# Altium PCB WL-EEG.PcbDoc
Units mil, origin at the board's own origin, x right, y up, seen from the top; angles counter-clockwise.
Board outline 6000 x 4000 mil, 2 copper layers (Top Layer, Bottom Layer); 1 components, 0 nets, 36 pads, 0 vias.
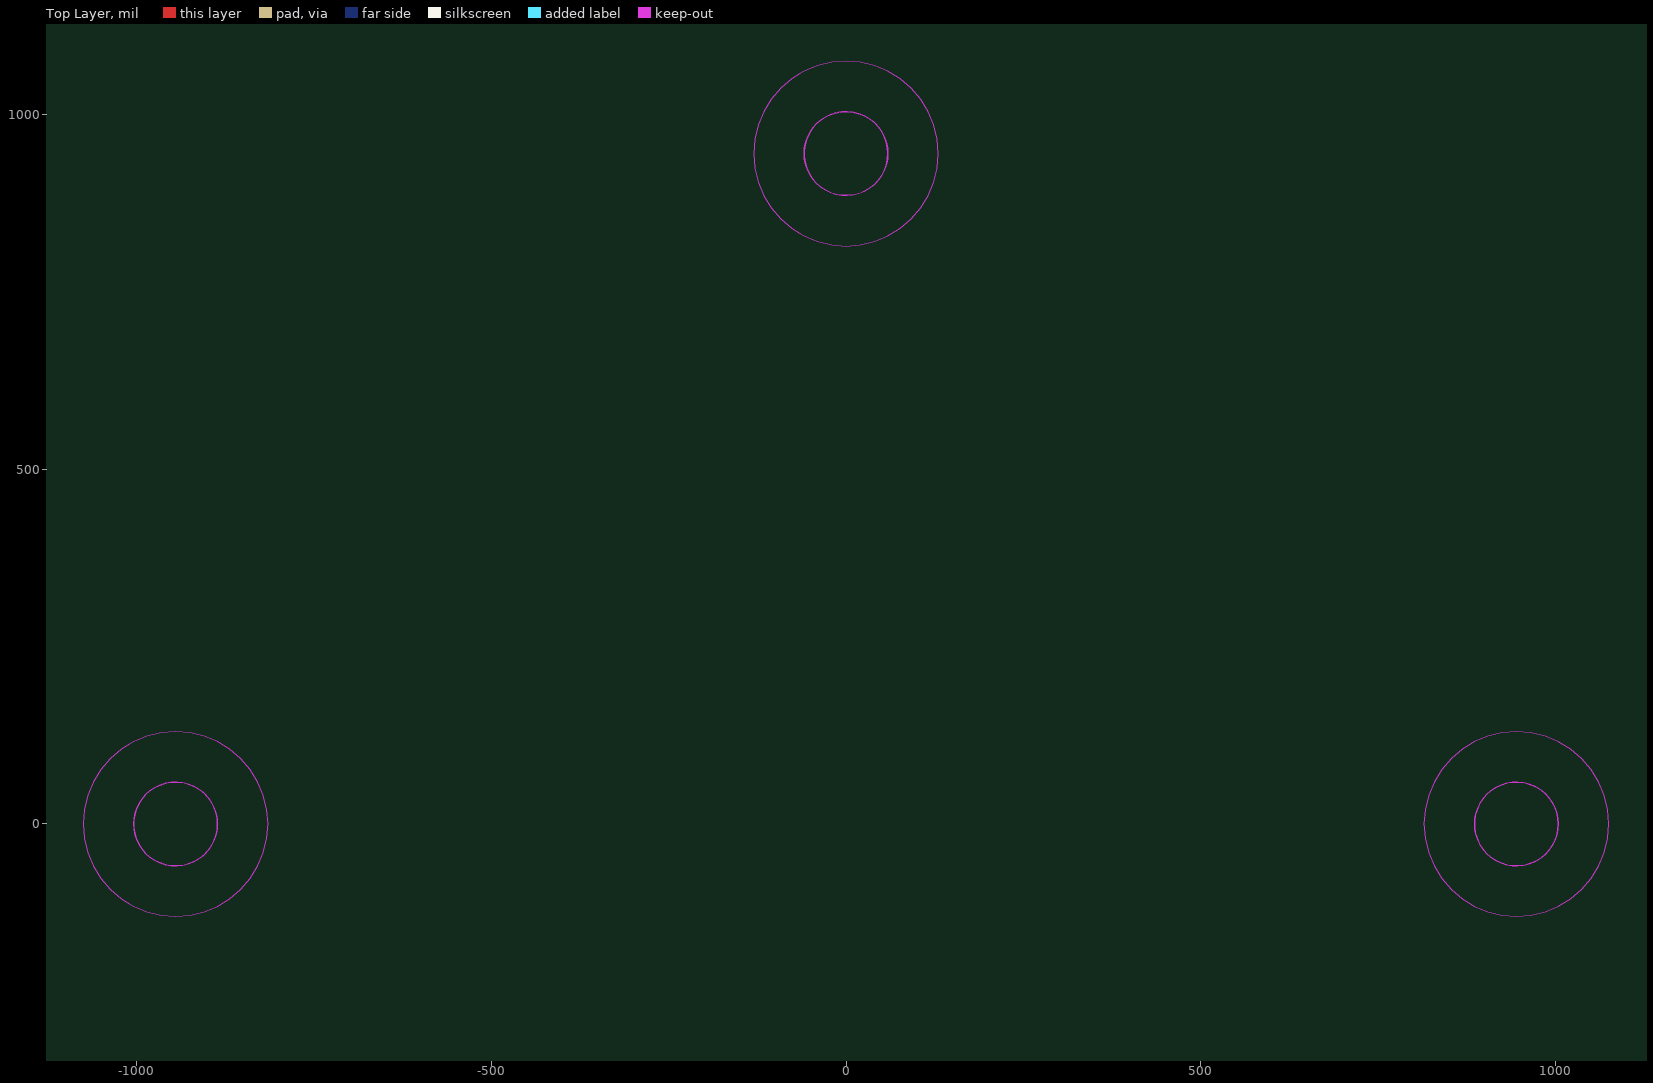
[diagram p0: Top Layer view]
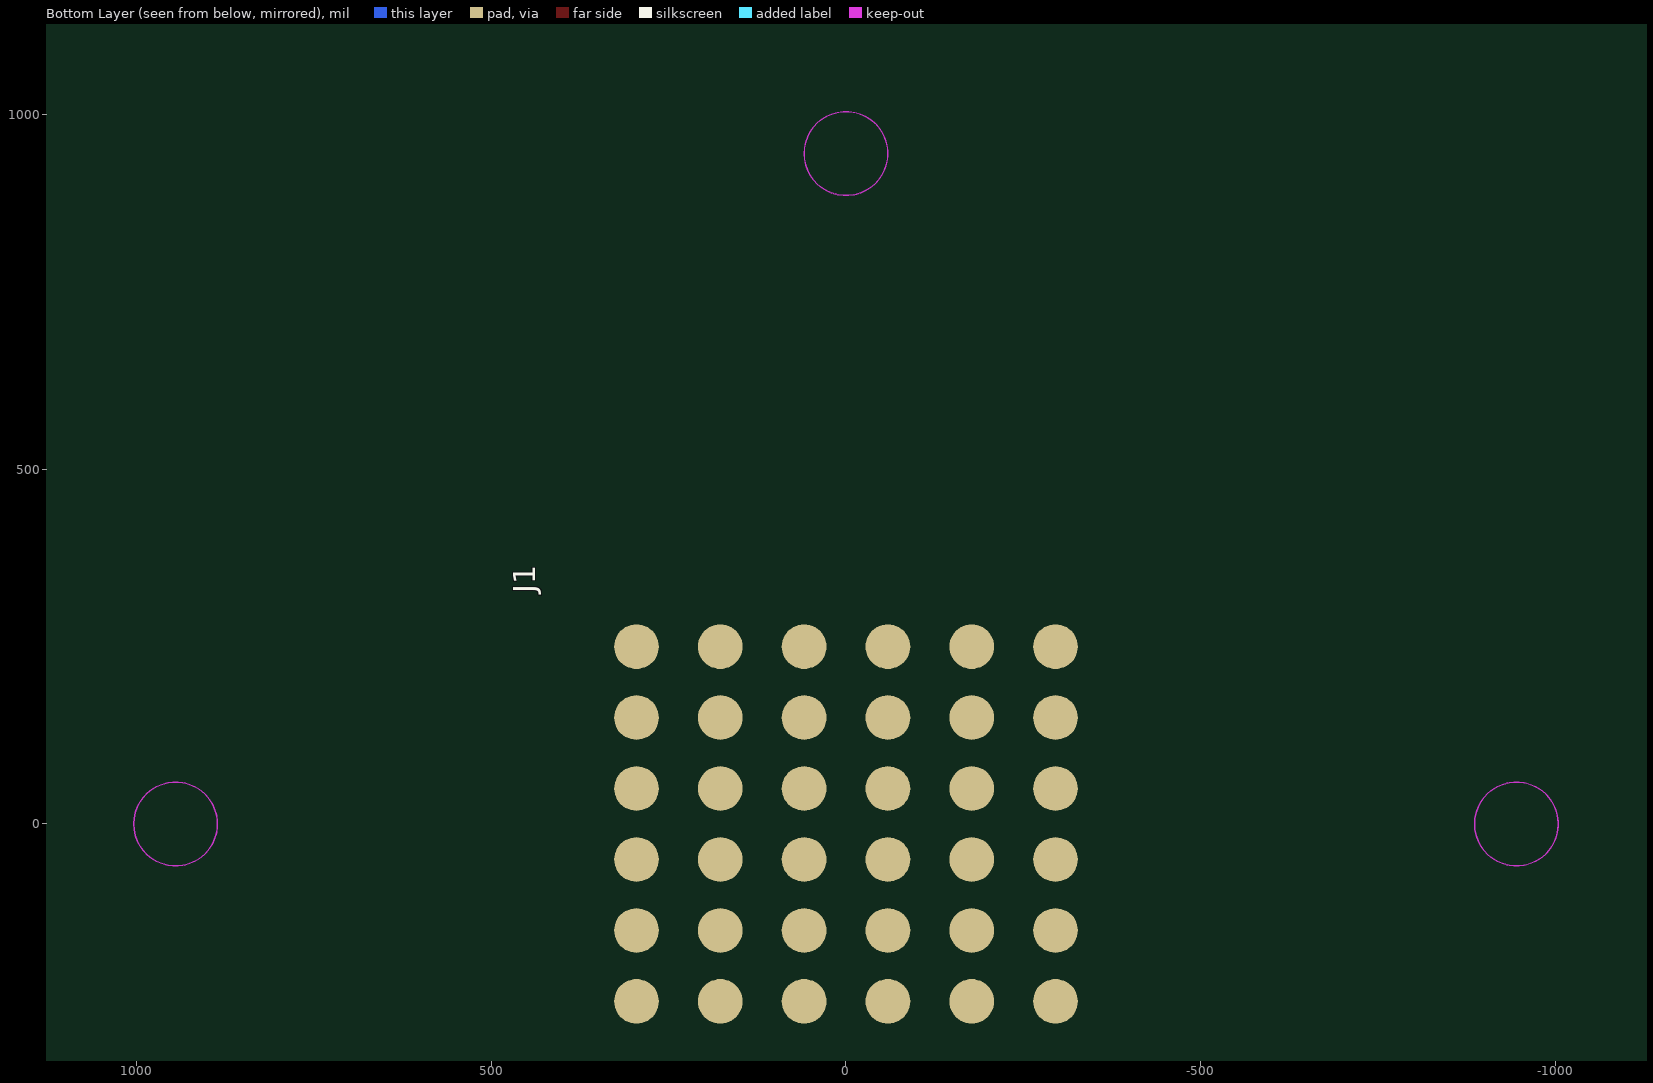
[diagram p1: Bottom Layer view, seen from below]

## Layer stack, top to bottom
Top Solder: solder mask 0.4, Solder Resist, Dk 3.5
Top Layer: signal copper 1.4
Dielectric 1: dielectric 12.6, FR-4, Dk 4.8
Bottom Layer: signal copper 1.4
Bottom Solder: solder mask 0.4, Solder Resist, Dk 3.5

## Board outline
-2940,-2440 3060,-2440 3060,1560 -2940,1560
cut-out: 59.06,944.88 ccw(c0,944.88) 59.06,944.88 cw(c0,944.88) -59.06,944.88 cw(c0,944.88)
cut-out: -885.83,0 cw(c-944.88,0) -1003.94,0 cw(c-944.88,0) -885.83,0 ccw(c-944.88,0)
cut-out: 1003.94,0 ccw(c944.88,0) 1003.94,0 cw(c944.88,0) 885.83,0 cw(c944.88,0)

## Design rules (kind name [scope] priority, off if disabled: settings)
Clearance [All] p1: gap=10 ignorepadtopadclearanceinfootprint=FALSE except(0: Arc-Hole Track-Hole SMDPad-Hole THPad-Hole Via-Hole Fill-Hole Poly-Hole Region-Hole Text-Hole)
PolygonConnect [All] p1: connectstyle=Relief reliefconductorwidth=10 reliefentries=4 polygonreliefangle="90 Angle" airgapwidth=10
RoomDefinition RoomsKeepin1 [All vs False] p1: confinementstyle=ConfineIn formatcopy=TRUE lockcomponents=FALSE outline 118.11,-1016.79 118.11,-905.51 -118.11,-905.51 -118.11,-1016.79 cw(c0,0) 1023.62,0 cw(c0,0)
RoomDefinition RoomsKeepin0 [All vs False] p2: confinementstyle=ConfineIn formatcopy=TRUE lockcomponents=FALSE outline 118.11,-1016.79 118.11,-905.51 -118.11,-905.51 -118.11,-1016.79 cw(c0,0) 1023.62,0 cw(c0,0)
RoutingVias [All] p1: holewidth=28 width=50 viastyle="Through Hole" minholewidth=28 minwidth=50 maxholewidth=28 maxwidth=50
SolderMaskExpansion [All] p1: expansion=4 istentingtop=FALSE
Width [All] p1: maxlimit=10 minlimit=10 preferedwidth=10
30 further rules are at their usual default settings.

## Components (designator, comment, footprint, x,y, rotation, side; value= is the part's Value field where it differs from the comment)
J1 "PIN6X6_SMD6X6_PIN6X6" SMD6X6 0,0 r90 bottom

## Footprints (in the part's own frame and the unit in brackets; to place one, negate y for a bottom-side part, rotate by r counter-clockwise, add the part's x,y. Pads: shape width x height; smd on the part's side, far side on the other; paste and mask are expansions set on the pad)
SMD6X6 [mm] "SMD6X6"
  round 1.6 smd: 1(6.35,7.5) 2(3.81,7.5) 3(1.27,7.5) 4(-1.27,7.5) 5(-3.81,7.5) 6(-6.35,7.5) 7(6.35,4.5) 8(3.81,4.5) 9(1.27,4.5) 10(-1.27,4.5) 11(-3.81,4.5) 12(-6.35,4.5) 13(6.35,1.5) 14(3.81,1.5) 15(1.27,1.5) 16(-1.27,1.5) 17(-3.81,1.5) 18(-6.35,1.5) 19(6.35,-1.5) 20(3.81,-1.5) 21(1.27,-1.5) 22(-1.27,-1.5) 23(-3.81,-1.5) 24(-6.35,-1.5) 25(6.35,-4.5) 26(3.81,-4.5) 27(1.27,-4.5) 28(-1.27,-4.5) 29(-3.81,-4.5) 30(-6.35,-4.5) 31(6.35,-7.5) 32(3.81,-7.5) 33(1.27,-7.5) 34(-1.27,-7.5) 35(-3.81,-7.5) 36(-6.35,-7.5)

## Nets (pads, with @x,y where several pads share a name; then routed paths per layer and width w, separated by ;. In a path a pad name is that pad's centre, name@x,y a point inside that pad or via, vN(x,y) a via of type N, cw(c..) or ccw(c..) an arc to the next point about the centre after c; other vN are vias at no path point)
pads on no net: J1.1 J1.2 J1.3 J1.4 J1.5 J1.6 J1.7 J1.8 J1.9 J1.10 J1.11 J1.12 J1.13 J1.14 J1.15 J1.16 J1.17 J1.18 J1.19 J1.20 J1.21 J1.22 J1.23 J1.24 J1.25 J1.26 J1.27 J1.28 J1.29 J1.30 J1.31 J1.32 J1.33 J1.34 J1.35 J1.36

## Keep-outs
Top Layer:
  region: 130.32,944.88 128.72,965.27 123.94,985.15 116.12,1004.05 105.43,1021.48 92.15,1037.03 76.6,1050.32 59.17,1061 40.27,1068.83 20.39,1073.6 0,1075.2 -20.39,1073.6 -40.27,1068.83 -59.17,1061 -64.98,1057.44 -76.6,1050.32 -92.15,1037.03 -105.43,1021.48 -116.12,1004.05 -123.94,985.15 -128.72,965.27 -130.32,944.88 -128.72,924.49 -123.94,904.61 -116.12,885.72 -105.43,868.28 -92.15,852.73 -76.6,839.45 -64.98,832.33 -59.17,828.76 -40.27,820.94 -20.39,816.16 0,814.56 20.39,816.16 40.27,820.94 59.17,828.76 76.6,839.45 92.15,852.73 105.43,868.28 116.12,885.72 123.94,904.61 128.72,924.49 130.32,944.88
  region: -814.56,0 -816.16,20.39 -820.94,40.27 -828.76,59.17 -839.45,76.6 -852.73,92.15 -868.28,105.43 -885.72,116.12 -904.61,123.94 -924.49,128.72 -944.88,130.32 -965.27,128.72 -985.15,123.94 -1004.05,116.12 -1009.86,112.55 -1021.48,105.43 -1037.03,92.15 -1050.32,76.6 -1061,59.17 -1068.83,40.27 -1073.6,20.39 -1075.2,0 -1073.6,-20.39 -1068.83,-40.27 -1061,-59.17 -1050.32,-76.6 -1037.03,-92.15 -1021.48,-105.43 -1009.86,-112.55 -1004.05,-116.12 -985.15,-123.94 -965.27,-128.72 -944.88,-130.32 -924.49,-128.72 -904.61,-123.94 -885.72,-116.12 -868.28,-105.43 -852.73,-92.15 -839.45,-76.6 -828.76,-59.17 -820.94,-40.27 -816.16,-20.39 -814.56,0
  region: 1075.2,0 1073.6,20.39 1068.83,40.27 1061,59.17 1050.32,76.6 1037.03,92.15 1021.48,105.43 1004.05,116.12 985.15,123.94 965.27,128.72 944.88,130.32 924.49,128.72 904.61,123.94 885.72,116.12 879.9,112.55 868.28,105.43 852.73,92.15 839.45,76.6 828.76,59.17 820.94,40.27 816.16,20.39 814.56,0 816.16,-20.39 820.94,-40.27 828.76,-59.17 839.45,-76.6 852.73,-92.15 868.28,-105.43 879.9,-112.55 885.72,-116.12 904.61,-123.94 924.49,-128.72 944.88,-130.32 965.27,-128.72 985.15,-123.94 1004.05,-116.12 1021.48,-105.43 1037.03,-92.15 1050.32,-76.6 1061,-59.17 1068.83,-40.27 1073.6,-20.39 1075.2,0

## Silkscreen, mask and mechanical layers (free items; w line width, h text height)
Mechanical 1:
  circle w0.5: c0,0 r944.88
Board:
  lines w1: -39.78,-1101.65 cw(c0,0) 1102.36,0 cw(c0,0) 39.78,-1101.65 39.37,-1101.65 39.37,-984.25 -39.37,-984.25 -39.37,-1101.65 -39.78,-1101.65
  lines w7.87: -39.78,-1101.65 -39.37,-1101.65 -39.37,-984.25 39.37,-984.25 39.37,-1101.65 39.78,-1101.65
Mechanical 7:
  lines w1: 485.83,6697.64 7212.83,6697.64 ; 485.83,6947.64 7212.83,6947.64 ; 485.83,7197.64 7212.83,7197.64 ; 485.83,7447.64 7212.83,7447.64 ; 485.83,7697.64 7212.83,7697.64 ; 485.83,7947.64 7212.83,7947.64 ; 485.83,8197.64 7212.83,8197.64 ; 485.83,8447.64 7212.83,8447.64 ; 485.83,8697.64 7212.83,8697.64 ; 485.83,8947.64 7212.83,8947.64 ; 485.83,9197.64 7212.83,9197.64 ; 929.33,8572.64 941.33,8572.64 ; 935.33,8566.64 935.33,8578.64 ; 1384.83,6447.64 1384.83,8947.64 ; 3275.83,6447.64 3275.83,8947.64 ; 5166.83,6447.64 5166.83,8947.64 ; 6437.83,6447.64 6437.83,8947.64 ; 485.83,6447.64 7212.83,6447.64 7212.83,9453.54 485.83,9453.54 485.83,6447.64 ; 872.33,7322.64 935.33,7259.65 998.32,7322.64 935.33,7385.63 872.33,7322.64 ; 875.67,7572.64 893.14,7614.82 935.33,7632.3 977.51,7614.82 994.99,7572.64 977.51,7530.45 935.33,7512.98 893.14,7530.45 875.67,7572.64 ; 892.02,6541.14 ccw(c892.02,6572.64) 892.02,6604.13 978.63,6604.13 ccw(c978.63,6572.64) 978.63,6541.14 892.02,6541.14 ; 892.02,6791.14 ccw(c892.02,6822.64) 892.02,6854.13 978.63,6854.13 ccw(c978.63,6822.64) 978.63,6791.14 892.02,6791.14 ; 895.96,7033.27 974.7,7033.27 935.33,7112.01 895.96,7033.27 ; 913.87,7811.91 913.87,7833.37 935.33,7844.09 956.78,7833.37 956.78,7811.91 935.33,7801.18 913.87,7811.91 ; 915.33,8072.64 925.33,8092.64 945.33,8092.64 955.33,8072.64 945.33,8052.64 925.33,8052.64 915.33,8072.64 ; 919.58,8306.89 919.58,8338.39 951.07,8338.39 951.07,8306.89 919.58,8306.89
  text "DRILL CHART: TOP to BOTTOM" at 2549.33,9266.04 h125
  text "ALL UNITS ARE IN MILLIMETERS" at 2449.33,9010.14 h125
  text "FIGURE" at 635.33,8760.14 h125
  text "SIZE" at 2130.33,8760.14 h125
  text "TOLERANCE" at 3771.33,8760.14 h125
  text "PLATED" at 5502.33,8760.14 h125
  text "QTY" at 6675.33,8760.14 h125
  text "0.3048" at 2030.33,8510.14 h125
  text "+0.0/-0.0" at 3771.33,8510.14 h125
  text "PLATED" at 5502.33,8510.14 h125
  text "717" at 6675.33,8510.14 h125
  text "0.8" at 2180.33,8260.14 h125
  text "+0.0/-0.0" at 3771.33,8260.14 h125
  text "PLATED" at 5502.33,8260.14 h125
  text "55" at 6725.33,8260.14 h125
  text "1.016" at 2080.33,8010.14 h125
  text "+0.0/-0.0" at 3771.33,8010.14 h125
  text "PLATED" at 5502.33,8010.14 h125
  text "72" at 6725.33,8010.14 h125
  text "1.09" at 2130.33,7760.14 h125
  text "+0.0/-0.0" at 3771.33,7760.14 h125
  text "PLATED" at 5502.33,7760.14 h125
  text "18" at 6725.33,7760.14 h125
  text "1.4" at 2180.33,7510.14 h125
  text "+0.0/-0.0" at 3771.33,7510.14 h125
  text "PLATED" at 5502.33,7510.14 h125
  text "6" at 6775.33,7510.14 h125
  text "3.2" at 2180.33,7260.14 h125
  text "+0.0/-0.0" at 3771.33,7260.14 h125
  text "PLATED" at 5502.33,7260.14 h125
  text "4" at 6775.33,7260.14 h125
  text "2.0" at 2180.33,7010.14 h125
  text "+0.0/-0.0" at 3771.33,7010.14 h125
  text "NON-PLATED" at 5302.33,7010.14 h125
  text "4" at 6775.33,7010.14 h125
  text "3.0x0.8" at 1980.33,6760.14 h125
  text "+0.05/-0.05" at 3671.33,6760.14 h125
  text "PLATED" at 5502.33,6760.14 h125
  text "2" at 6775.33,6760.14 h125
  text "3.0x0.8" at 1980.33,6510.14 h125
  text "+0.05/-0.05" at 3671.33,6510.14 h125
  text "PLATED" at 5502.33,6510.14 h125
  text "1" at 6775.33,6510.14 h125
Mechanical 9:
  lines w1: -7.87,0 7.87,0 ; 0,-7.87 0,7.87

## Text inside footprints (layer, text, board x,y; h text height)
J1: Mechanical 10 "1" at 275.28,200 h25 r270; Mechanical 10 "36" at -335.28,-300 h25 r270; Mechanical 10 "2" at 275.28,100 h25 r270; Mechanical 10 "3" at 275.28,0 h25 r270; Mechanical 10 "4" at 275.28,-100 h25 r270; Mechanical 10 "5" at 275.28,-200 h25 r270; Mechanical 10 "6" at 275.28,-300 h25 r270; Mechanical 10 "7" at 157.17,200 h25 r270; Mechanical 10 "8" at 157.17,100 h25 r270; Mechanical 10 "9" at 157.17,0 h25 r270; Mechanical 10 "10" at 137.17,-100 h25 r270; Mechanical 10 "11" at 137.17,-200 h25 r270; Mechanical 10 "12" at 137.17,-300 h25 r270; Mechanical 10 "13" at 19.06,200 h25 r270; Mechanical 10 "14" at 19.06,100 h25 r270; Mechanical 10 "15" at 19.06,0 h25 r270; Mechanical 10 "16" at 19.06,-100 h25 r270; Mechanical 10 "17" at 19.06,-200 h25 r270; Mechanical 10 "18" at 19.06,-300 h25 r270; Mechanical 10 "19" at -99.06,200 h25 r270; Mechanical 10 "20" at -99.06,100 h25 r270; Mechanical 10 "21" at -99.06,0 h25 r270; Mechanical 10 "22" at -99.06,-100 h25 r270; Mechanical 10 "23" at -99.06,-200 h25 r270; Mechanical 10 "24" at -99.06,-300 h25 r270; Mechanical 10 "25" at -217.17,200 h25 r270; Mechanical 10 "26" at -217.17,100 h25 r270; Mechanical 10 "27" at -217.17,0 h25 r270; Mechanical 10 "28" at -217.17,-100 h25 r270; Mechanical 10 "29" at -217.17,-200 h25 r270; Mechanical 10 "30" at -217.17,-300 h25 r270; Mechanical 10 "31" at -335.28,200 h25 r270; Mechanical 10 "32" at -335.28,100 h25 r270; Mechanical 10 "33" at -335.28,0 h25 r270; Mechanical 10 "34" at -335.28,-100 h25 r270; Mechanical 10 "35" at -335.28,-200 h25 r270